# EAGLE board Charging Dock 1.8 (EAGLE 7.7.0)
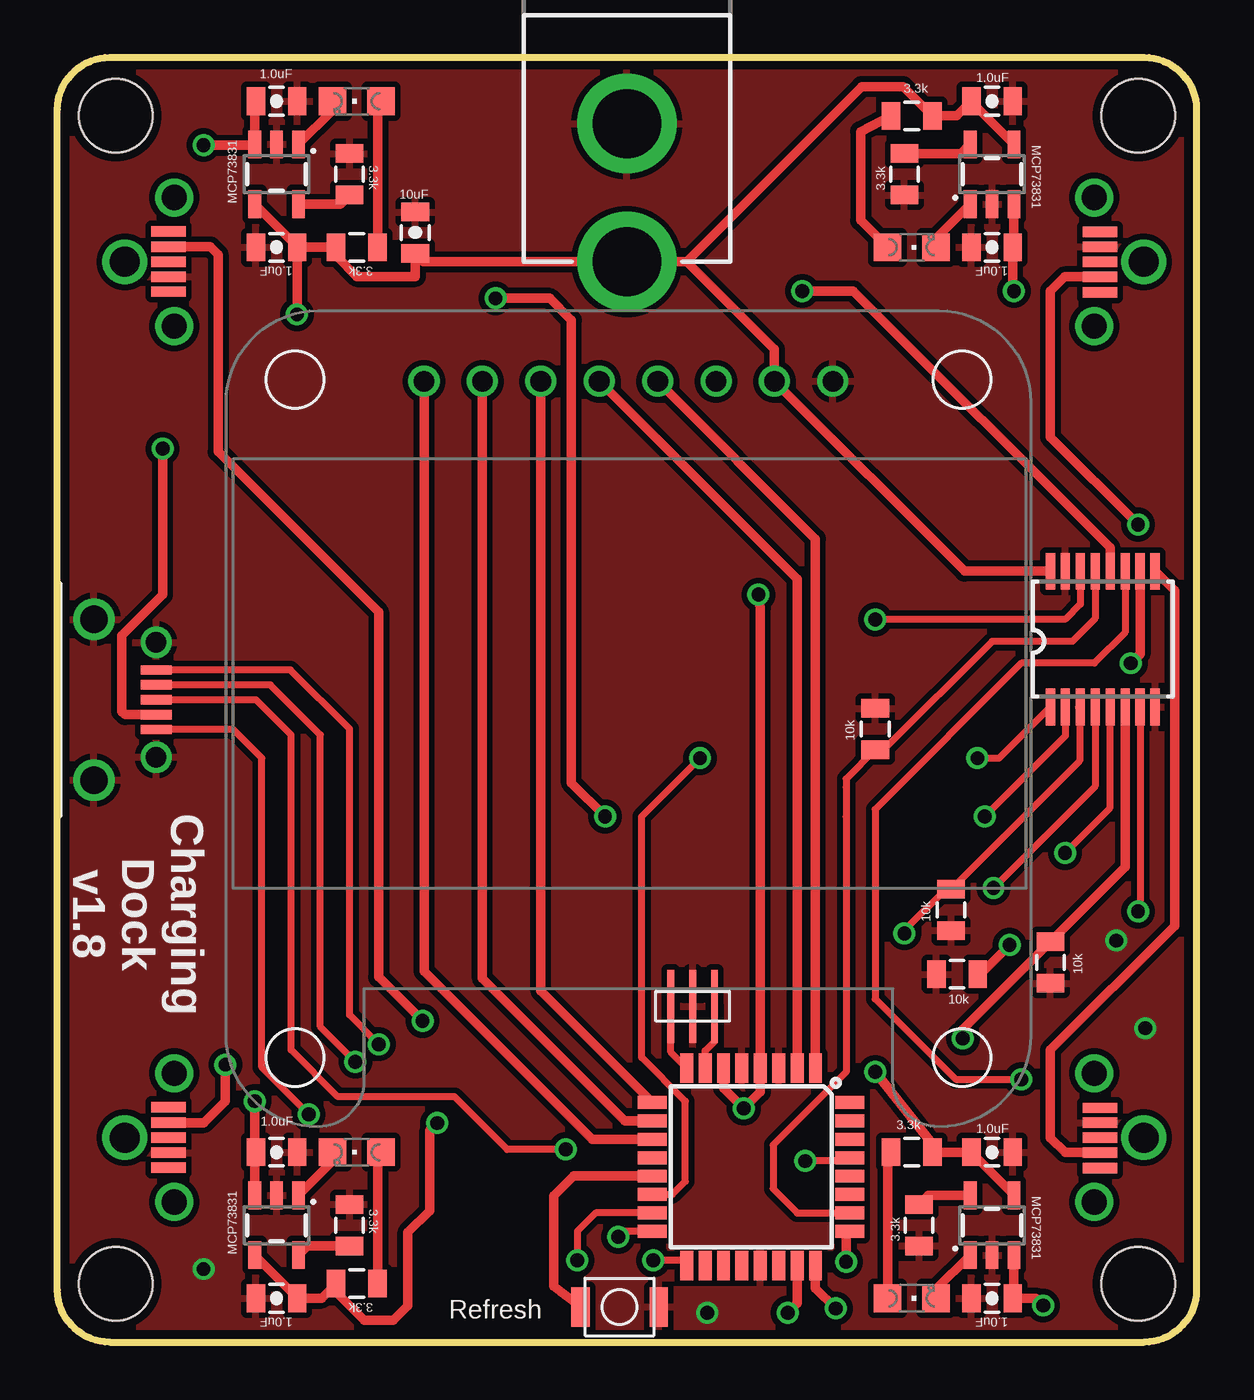
[diagram p0: board, top side]
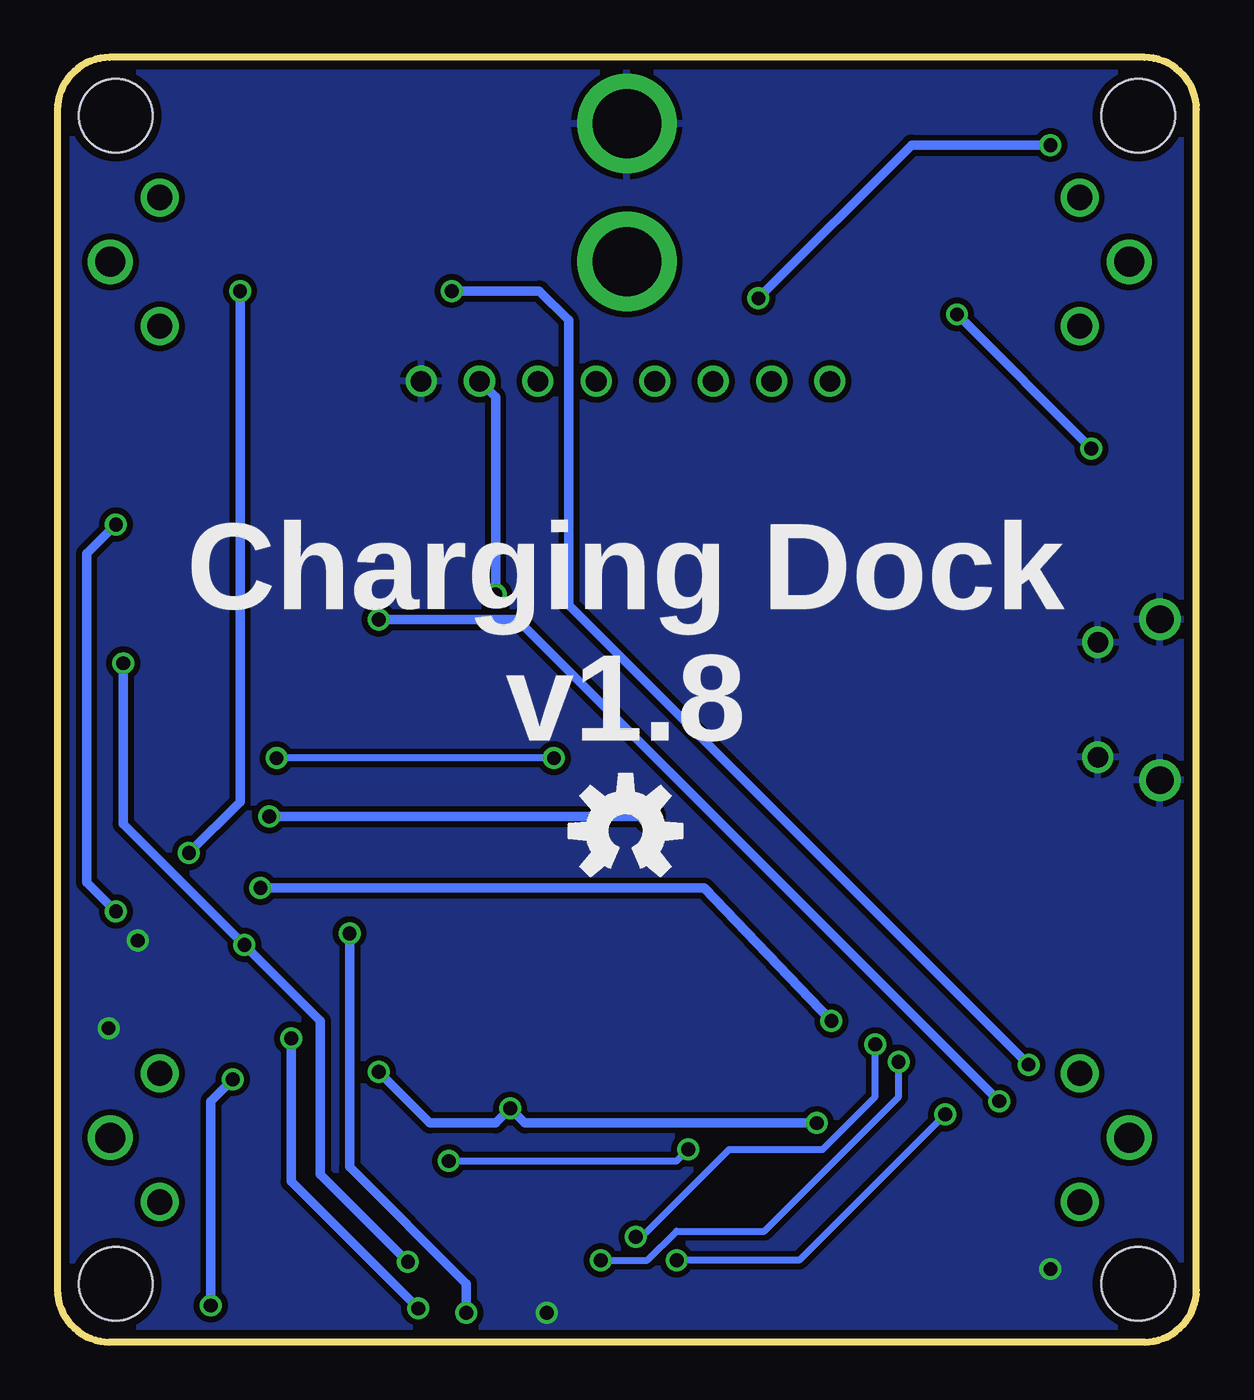
[diagram p1: board, bottom side, seen from below]

Size 49.53 x 55.88 mm. Coordinates in mm from the lower left corner, seen from the top.
Outline: 0,2.27 0,53.61 arc-90 2.27,55.88 47.26,55.88 arc-90 49.53,53.61 49.53,2.27 arc-90 47.26,0 2.27,0 arc-90 0,2.27
Copper layers (1*16): Top 0.0356mm / dielectric 1.5011mm / Bottom 0.0356mm
Design rules "LaenPCBOrder": minimum track width 6mil, minimum drill 13mil, track to track 6mil, track to pad 6mil, pad to pad 6mil, via to via 6mil, smd to smd 6mil, copper to edge 15mil, drill to drill 6mil, minimum pad ring 7mil, minimum via ring 7mil, stop-mask expansion 3mil, vias tented up to drill 0mil, thermal gap 10mil
Net classes: 0 default: width 0.254 mm, clearance 0.254 mm; 1 power: width 0.61 mm, drill 0.61 mm, clearance 0.254 mm; 2 gnd: width 0.305 mm, drill 0.559 mm, clearance 0.254 mm; 3 usbvcc: width 0.508 mm, drill 0.61 mm, clearance 0.254 mm; 4 aref: width 0.406 mm, drill 0.61 mm, clearance 0.254 mm
Holes 3.2 mm at 2.54,53.34 2.54,2.54 46.99,53.34 46.99,2.54

## Footprints (pad centres in the part's own frame; a part is rotated, then mirrored left to right if it is on the bottom)
0805-CAP = smd 0.8 x 1.2: 1 -0.9,0; 2 0.9,0
BARREL_CONN = drill 2.997 pad 4.318: GND 0,7.7; PWR 0,13.7
CHIPLED_0805 = smd 1.2 x 1.2: A 0,-1.05; C 0,1.05
CSTCE_V = smd 0.3 x 3.175: 1 -0.95,0; 2 0,0; 3 0.95,0
0805 = smd 0.8 x 1.2: 1 -0.9,0; 2 0.9,0
SOT23-5 = smd 0.55 x 1.2: 1 -0.95,-1.3; 2 0,-1.3; 3 0.95,-1.3; 4 0.95,1.3; 5 -0.95,1.3
TQFP32-08 = smd 1.27 x 0.559: 1 -4.293,2.8; 2 -4.293,2; 3 -4.293,1.2; 4 -4.293,0.4; 5 -4.293,-0.4; 6 -4.293,-1.2; 7 -4.293,-2; 8 -4.293,-2.8; 17 4.293,-2.8; 18 4.293,-2; 19 4.293,-1.2; 20 4.293,-0.4; 21 4.293,0.4; 22 4.293,1.2; 23 4.293,2; 24 4.293,2.8 | smd 0.559 x 1.27: 9 -2.8,-4.293; 10 -2,-4.293; 11 -1.2,-4.293; 12 -0.4,-4.293; 13 0.4,-4.293; 14 1.2,-4.293; 15 2,-4.293; 16 2.8,-4.293; 25 2.8,4.293; 26 2,4.293; 27 1.2,4.293; 28 0.4,4.293; 29 -0.4,4.293; 30 -1.2,4.293; 31 -2,4.293; 32 -2.8,4.293
TSSOP16 = smd 0.4 x 1.6: 1 -2.225,-2.85; 2 -1.575,-2.85; 3 -0.925,-2.85; 4 -0.275,-2.85; 5 0.375,-2.85; 6 1.025,-2.85; 7 1.675,-2.85; 8 2.325,-2.85; 9 2.325,3.05; 10 1.675,3.05; 11 1.025,3.05; 12 0.375,3.05; 13 -0.275,3.05; 14 -0.925,3.05; 15 -1.575,3.05; 16 -2.225,3.05
USB_HORZ_REINFORCED_MICRO = drill 1.2: G1 -3.5,0; G2 3.5,0 | smd 0.4 x 1.35: P1 -1.3,2.7; P2 -0.65,2.7; P3 0,2.7; P4 0.65,2.7; P5 1.3,2.7 | drill 0.9: P$1 -2.5,2.7; P$2 2.5,2.7
SWITCH_MOMENTARY_XS = smd 0.8 x 1.7: P$1 -1.7,0; P$2 1.7,0
USB_VERT_MICRO_SMD = smd 0.45 x 1.5: P1 -1.33,-0.25; P2 -0.65,-0.25; P3 0,-0.25; P4 0.65,-0.25; P5 1.3,-0.25 | drill 1.1: P$1 -2.8,0; P$2 2.8,0 | drill 1.3: P$3 0,-2.15
OLED_DISPLAY = drill 0.9: 3V3 3.81,14.68; CLK -6.35,14.68; CS 1.27,14.68; DATA -8.89,14.68; DC -3.81,14.68; GND 8.89,14.68; RST -1.27,14.68; VIN 6.35,14.68

## Placement (x,y rotation side)
C2  1.0uF  [0805-CAP]  40.64,1.91 180 top
C3  1.0uF  [0805-CAP]  40.64,8.26 0 top
C4  1.0uF  [0805-CAP]  9.53,53.98 0 top
C5  1.0uF  [0805-CAP]  9.53,47.62 180 top
C6  1.0uF  [0805-CAP]  9.53,8.26 0 top
C7  1.0uF  [0805-CAP]  9.53,1.91 180 top
C8  10uF  [0805-CAP]  15.56,48.26 270 top
C10  1.0uF  [0805-CAP]  40.64,47.62 180 top
C11  1.0uF  [0805-CAP]  40.64,53.98 0 top
J1  POWER_JACK"  [BARREL_CONN]  24.77,60.71 180 top
LED1  [CHIPLED_0805]  37.15,47.62 270 top
LED2  [CHIPLED_0805]  37.15,1.91 270 top
LED3  [CHIPLED_0805]  13.02,8.26 90 top
LED4  [CHIPLED_0805]  13.02,53.98 90 top
Q1  RESONATOR_CSTCE_V  [CSTCE_V]  27.62,14.61 180 top
R1  3.3k  [0805]  37.15,53.34 180 top
R2  3.3k  [0805]  37.15,8.26 180 top
R3  3.3k  [0805]  37.47,5.08 270 top
R4  3.3k  [0805]  13.02,47.62 0 top
R5  3.3k  [0805]  13.02,2.54 0 top
R6  3.3k  [0805]  12.7,50.8 90 top
R7  10k  [0805]  38.86,18.8 90 top
R8  10k  [0805]  43.18,16.51 90 top
R9  3.3k  [0805]  12.7,5.08 90 top
R10  10k  [0805]  35.56,26.67 90 top
R11  10k  [0805]  39.12,16 180 top
R16  3.3k  [0805]  36.83,50.8 270 top
U1  MCP73831  [SOT23-5]  40.64,5.08 0 top
U2  MCP73831  [SOT23-5]  9.53,50.8 180 top
U3  MCP73831  [SOT23-5]  9.53,5.08 180 top
U4  ATMEGA328P_TQFP  [TQFP32-08]  30.16,7.62 270 top
U5  MCP73831  [SOT23-5]  40.64,50.8 0 top
U6  MAX4674TSSOP  [TSSOP16]  45.4,30.48 0 top
U$1  USB_MICRO_SOCKET_HORZ_REINFORCED  [USB_HORZ_REINFORCED_MICRO]  1.59,27.94 270 top
U$2  SWITCH-MOMENTARY-NO  [SWITCH_MOMENTARY_XS]  24.45,1.52 0 top
U$6  USB_MICRO_SOCKET_VERT  [USB_VERT_MICRO_SMD]  45.09,8.89 90 top
U$7  USB_MICRO_SOCKET_VERT  [USB_VERT_MICRO_SMD]  45.09,46.99 90 top
U$8  USB_MICRO_SOCKET_VERT  [USB_VERT_MICRO_SMD]  5.08,46.99 270 top
U$9  USB_MICRO_SOCKET_VERT  [USB_VERT_MICRO_SMD]  5.08,8.89 270 top
U$10  OLED_DISPLAY  [OLED_DISPLAY]  24.83,27.11 0 top
U$15  [OSHW-LOGO-M]  24.83,22.23 0 bottom

## Library data of the parts
C2-C8 C10 C11 = SparkFun-Capacitors; PROD_ID: CAP-11625
J1 = Andy-library; DIGIKEY_PN: CP-037A-ND; MANUFACTURER: CUI Inc; MFG_PN: PJ-037A
LED1-LED4 = adafruit
Q1 R1-R11 R16 U6 U$1 U$2 U$6-U$10 = Andy-library
U1-U3 U5 = SparkFun-PowerIC; PROD_ID: IC-09995
U4 = SparkFun-DigitalIC; PROD_ID: IC-09069
U$15 = SparkFun-Aesthetics

## Nets
3.3V: U$10.3V3
5VDC: C3.1 C5.1 C7.1 C8.2 C11.1 J1.PWR R1.1 R2.1 R4.1 R5.1 U1.4 U2.4 U3.4 U4.4 U4.6 U5.4 U6.16 U$1.P4 U$10.VIN
COM1: U6.4 U$8.P2
COM2: U6.7 U$7.P2
COM3: U6.9 U$6.P2
COM4: U6.12 U$9.P2
ENABLE: U4.14 U6.1
GND: C2.2 C3.2 C4.2 C5.2 C6.2 C7.2 C8.1 C10.2 C11.2 J1.GND Q1.2 R3.2 R6.2 R7.1 R8.1 R9.2 R10.2 R11.2 R16.2 U1.2 U2.2 U3.2 U4.3 U4.5 U4.21 U5.2 U6.8 U6.15 U$1.G1 U$1.G2 U$1.P$1 U$1.P$2 U$2.P$2 U$6.P4 U$7.P4 U$8.P4 U$9.P4 U$10.GND
N$1: LED1.A R1.2
N$2: R9.1 U3.5
N$3: LED3.A R5.2
N$4: LED2.C U1.1
N$5: LED4.A R4.2
N$6: LED2.A R2.2
N$7: R6.1 U2.5
N$9: LED4.C U2.1
N$10: U4.15 U$1.P5
N$11: U4.17 U$1.P2
N$12: U4.16 U$1.P1
N$13: R16.1 U5.5
N$14: U4.1 U$10.CS
N$15: LED3.C U3.1
N$16: Q1.3 U4.8
N$17: Q1.1 U4.7
N$18: U4.2 U$10.RST
N$19: U4.9 U$10.DC
N$20: U4.10 U$10.CLK
N$21: U4.27
N$22: U4.28
N$23: U4.11 U$10.DATA
N$24: R3.1 U1.5
N$25: U4.13 U$2.P$1
N$26: U4.32
N$27: U4.12
N$42: LED1.C U5.1
NE_CHARGE: C10.1 U5.3 U6.5
NE_VOLT: R8.2 U4.24 U6.6
NW_CHARGE: C4.1 U2.3 U6.2
NW_VOLT: R7.2 U4.23 U6.3
RST: U4.29 U$1.P3
SE_CHARGE: C2.1 U1.3 U6.11
SE_VOLT: R11.1 U4.25 U6.10
SW_CHARGE: C6.1 U3.3 U6.14
SW_VOLT: R10.1 U4.26 U6.13

## Tracks (layer width: path | path; a pad name or v marks a point on that pad's centre or on a via)
5VDC  (via drill 0.6)
  Top 0.406: C5.1 R4.1 12.12,47.26 13.02,46.35 15.56,46.35 C8.2 15.91,47.01 J1.PWR 27.36,47.01 | U2.4 10.43,47.65 C5.1 | U3.4 10.43,1.93 C7.1 11.48,1.91 R5.1 12.12,2.17 13.34,0.95 14.61,0.95 15.24,1.59 15.24,4.76 16.19,5.71 16.19,9.21 v16.51,9.53 | U1.4 41.59,6.41 C3.1 R2.1 | 41.59,52.12 U5.4 39.74,53.95 C11.1 39.1,53.34 R1.1 36.78,54.61 34.97,54.61 27.36,47.01 | U4.6 28.96,11.04 v29.84,10.16 30.56,10.88 U4.4 30.56,31.92 v30.48,32.51 | 38.1,8.31 R2.1 | v35.56,11.75 38.05,8.62 R2.1 | U6.16 39.44,33.53 U$10.VIN 31.18,43.19 27.36,47.01 | U$1.P4 2.94,27.29 2.79,27.43 2.79,30.73 4.57,32.51 v4.57,38.86 | v10.41,44.7 10.43,44.72 C5.1
  Bottom 0.406: v16.51,9.53 29.21,9.53 v29.84,10.16 30.48,9.53 33.34,9.53 v35.56,11.75 | v30.48,32.51 30.48,41.1 U$10.VIN | v4.57,38.86 v10.41,44.7
COM1  (via drill 0.6)
  Top 0.305: U6.4 45.13,24.17 v40.7,19.75
  Top 0.406: U$8.P2 6.65,47.64 6.99,47.31 6.99,38.73 13.97,31.75 13.97,15.88 v15.88,13.97
  Bottom 0.406: v40.7,19.75 21.4,19.75 v15.88,13.97
COM2  (via drill 0.6)
  Top 0.305: U6.7 47.08,18.82
  Top 0.406: U$7.P2 43.8,46.34 43.18,45.72 43.18,39.37 v46.99,35.56 | 47.08,18.82 v46.99,18.73
  Bottom 0.406: v46.99,35.56 48.26,34.29 48.26,20 v46.99,18.73
COM3
  Top 0.406: U$6.P2 45.32,8.26 43.81,8.26 43.18,8.89 43.18,12.7 48.58,18.1 48.58,32.68 U6.9
COM4  (via drill 0.6)
  Top 0.406: U6.12 45.78,34.55 34.61,45.72 v32.38,45.72 | U$9.P2 6.37,9.54 7.3,10.48 v7.3,12.06
  Bottom 0.406: v32.38,45.72 28.57,45.72 27.3,44.45 27.3,32.07 v7.3,12.06
ENABLE  (via drill 0.6)
  Top 0.305: v27.94,25.4 25.4,22.86 25.4,12.38 27.3,10.48 27.3,6.99 26.74,6.42 U4.14 | v40.01,25.4 40.95,25.4 U6.1
  Bottom 0.305: v27.94,25.4 v40.01,25.4
GND  (via drill 0.6)
  other vias: 28.26,1.27 46.04,17.46 6.35,3.17 47.31,13.65
  pour Bottom: 49.53,55.88 49.53,0 0,0 0,55.88
  pour Top: 49.53,55.88 49.53,0 0,0 0,55.88
N$1
  Top 0.406: R1.2 34.92,52.65 34.92,48.8 LED1.A
N$2
  Top 0.406: U3.5 10.88,4.18 R9.1
N$3
  Top 0.406: LED3.A 13.92,8.11 R5.2
N$4
  Top 0.406: LED2.C 38.2,2.29 U1.1
N$5
  Top 0.406: LED4.A 13.92,53.83 R4.2
N$6
  Top 0.406: R2.2 36.1,8.11 LED2.A
N$7
  Top 0.406: U2.5 12.3,49.5 R6.1
N$9
  Top 0.406: U2.1 11.97,53.59 LED4.C
N$10  (via drill 0.6)
  Top 0.305: v10.92,9.91 8.89,11.94 8.89,25.4 7.65,26.64 U$1.P5 | U4.15 23.4,5.62 22.61,4.83 v22.61,3.56
  Bottom 0.305: v10.92,9.91 17.27,3.56 v22.61,3.56
N$11  (via drill 0.6)
  Top 0.305: v12.95,12.19 11.43,13.72 11.43,26.42 9.26,28.59 U$1.P2 | U4.17 27.13,3.56 v25.91,3.56
  Bottom 0.305: v12.95,12.19 12.95,10.67 18.8,4.83 22.61,4.83 23.88,3.56 v25.91,3.56
N$12  (via drill 0.6)
  Top 0.305: v13.97,12.95 12.7,14.22 12.7,26.67 10.13,29.24 U$1.P1 | U4.16 24.63,4.82 v24.38,4.57
  Bottom 0.305: v13.97,12.95 13.97,10.67 16.26,8.38 20.32,8.38 24.13,4.57 v24.38,4.57
N$13
  Top 0.406: R16.1 39.29,51.7 U5.5
N$14
  Top 0.406: U4.1 32.96,34.93 U$10.CS
N$15
  Top 0.406: U3.1 11.97,7.87 LED3.C
N$16
  Top 0.305: U4.8 26.67,12.61 26.67,13.97 Q1.3
N$17
  Top 0.305: U4.7 28.16,12.67 28.57,13.08 Q1.1
N$18
  Top 0.406: U4.2 32.16,33.19 U$10.RST
N$19
  Top 0.406: U4.9 21.02,15.27 U$10.DC
N$20
  Top 0.406: U4.10 24.67,9.62 18.48,15.81 U$10.CLK
N$23
  Top 0.406: U4.11 23.25,8.82 15.94,16.13 U$10.DATA
N$24
  Top 0.406: R3.1 37.87,6.38 U1.5
N$25
  Top 0.406: U4.13 22.46,7.22 21.59,6.35 21.59,2.43 U$2.P$1
N$42
  Top 0.406: LED1.C 38.2,48.01 U5.1
NE_CHARGE  (via drill 0.6)
  Top 0.305: v43.81,21.27 45.78,23.23 U6.5
  Top 0.406: v41.59,45.72 41.54,45.77 C10.1 41.59,47.67 U5.3
  Bottom 0.406: v43.81,21.27 41.59,23.5 v41.59,45.72
NE_VOLT  (via drill 0.6)
  Top 0.406: v33.85,1.46 32.96,2.34 U4.24 | U6.6 46.43,20.66 R8.2 39.37,13.6 v39.37,13.21
  Bottom 0.406: v39.37,13.21 39.37,6.99 v33.85,1.46
NW_CHARGE  (via drill 0.6)
  Top 0.305: U6.2 43.83,26.36 v40.32,22.86
  Top 0.406: v6.35,52.07 8.54,52.07 U2.3 8.57,53.92 C4.1 | v23.81,22.86 22.35,24.32 22.35,44.45 21.4,45.4 v19.05,45.4
  Bottom 0.406: v40.32,22.86 v23.81,22.86 | v19.05,45.4 12.38,52.07 v6.35,52.07
NW_VOLT  (via drill 0.6)
  Top 0.305: 44.45,27.6 44.45,25.28 R7.2 38.63,19.7 36.83,17.9 v36.83,17.78
  Top 0.406: U6.3 44.45,27.6 | v31.75,1.27 32.16,1.68 U4.23
  Bottom 0.406: v36.83,17.78 36.83,7.62 31.75,2.54 v31.75,1.27
RST  (via drill 0.6)
  Top 0.305: U4.29 34.31,7.87 v32.51,7.87 | v22.1,8.38 19.56,8.38 17.27,10.67 12.19,10.67 10.16,12.7 10.16,26.42 8.64,27.94 U$1.P3
  Bottom 0.305: v32.51,7.87 22.61,7.87 v22.1,8.38
SE_CHARGE  (via drill 0.6)
  Top 0.305: U6.11 46.43,30.87 45.09,29.53 41.91,29.53 35.56,23.18 35.56,14.92 39.05,11.43 v41.91,11.43
  Top 0.406: v42.86,1.59 42.55,1.91 C2.1 41.59,1.96 U1.3
  Bottom 0.406: v41.91,11.43 42.86,10.48 v42.86,1.59
SE_VOLT  (via drill 0.6)
  Top 0.406: U6.10 47.08,29.93 v46.67,29.53 | v34.29,3.49 34.29,4.66 U4.25 | v41.4,17.27 40.13,16 R11.1
  Bottom 0.406: v46.67,29.53 46.67,22.54 v41.4,17.27 38.1,13.97 38.1,7.3 v34.29,3.49
SW_CHARGE  (via drill 0.6)
  Top 0.305: U6.14 44.48,32.09 43.81,31.43 v35.56,31.43
  Top 0.406: v8.57,10.48 8.57,8.31 C6.1 8.57,8.21 U3.3
  Bottom 0.406: v35.56,31.43 29.53,31.43 v8.57,10.48
SW_VOLT
  Top 0.305: U6.13 45.13,31.48 44.13,30.48 40.64,30.48 35.93,25.77 R10.1 34.29,24.5 34.29,24.13 34.29,22.86 34.29,11.75 31.11,8.57 31.11,6.67 32.16,5.62 U4.26

## Text on the board
tPlace: Charging / Dock / v1.8
bPlace: Charging Dock / v1.8
tNames: Refresh
214bmp: D:/SmartProjects/Snc/a4_bn_logo2.bmp